# EAGLE board eTapper1main33 (EAGLE 8.3.2)
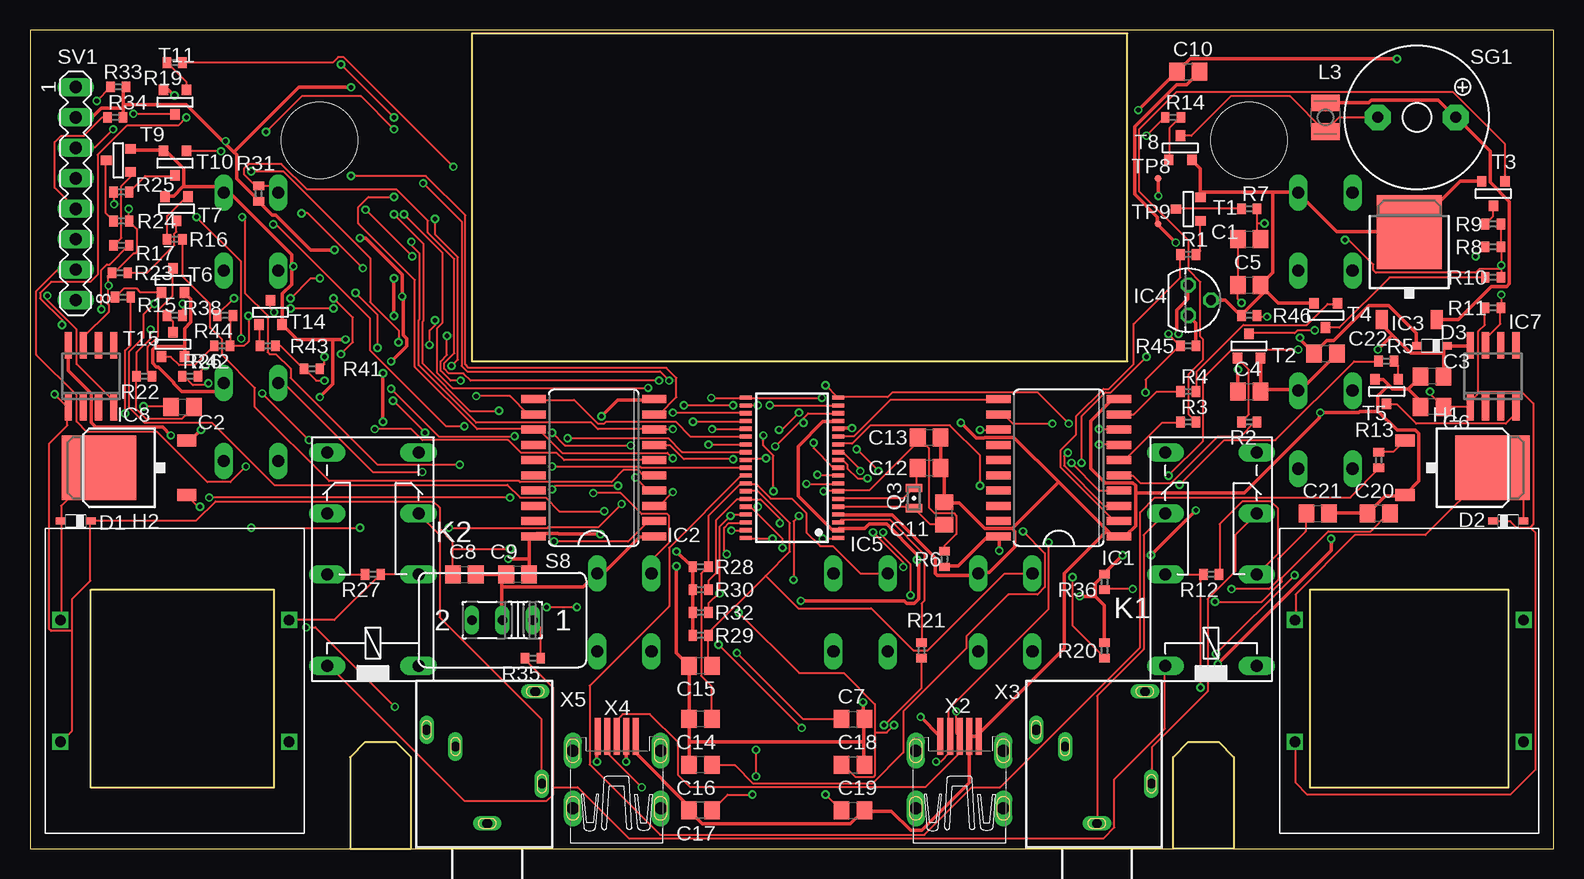
[diagram p0: board, top side]
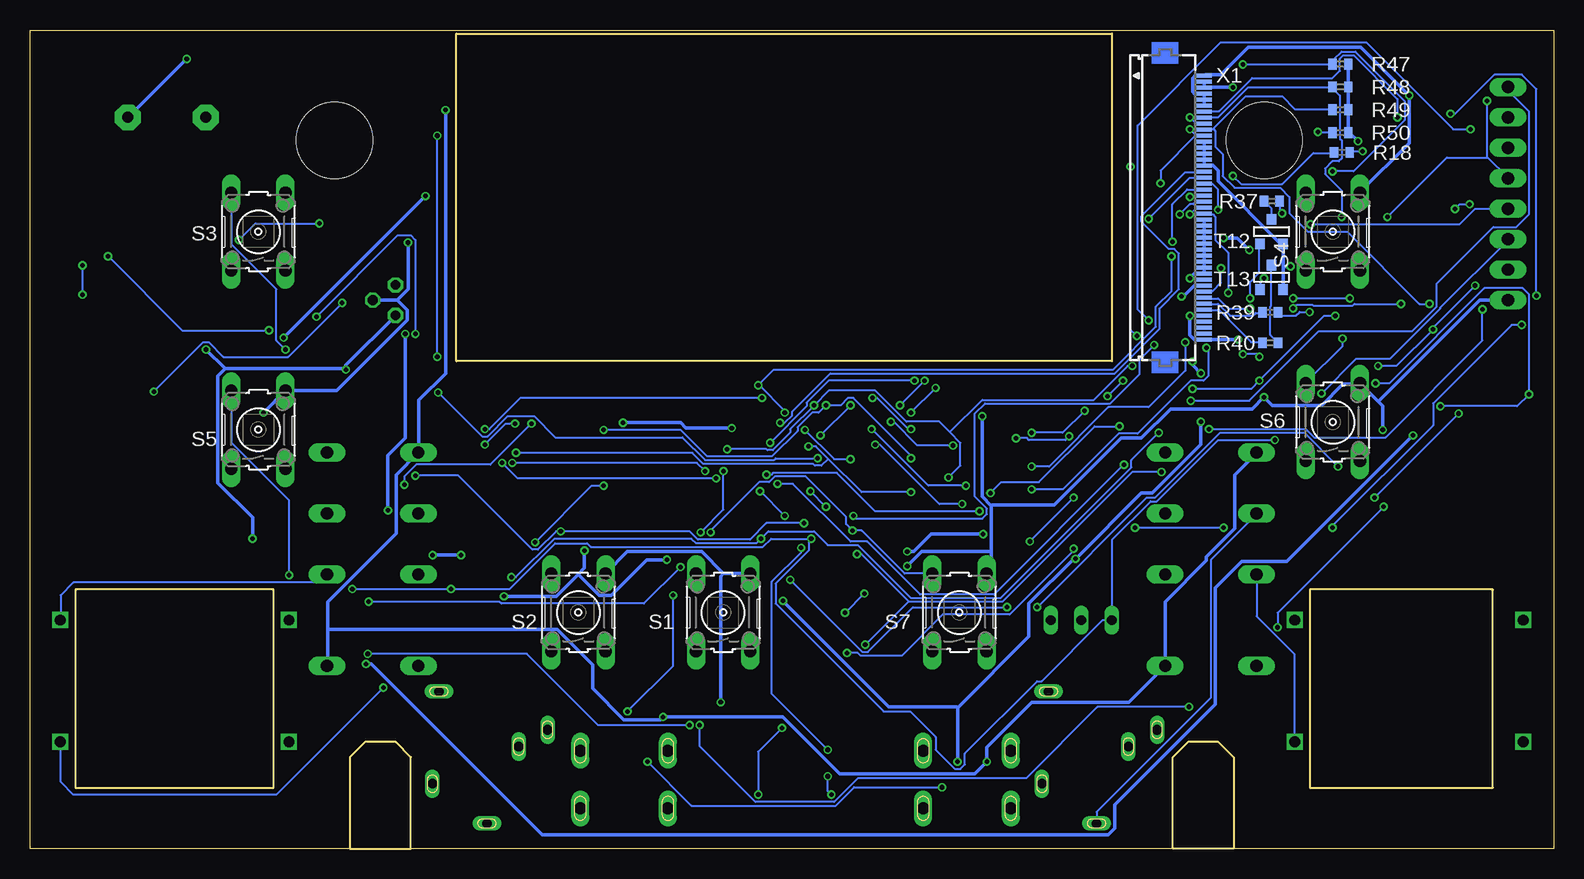
[diagram p1: board, bottom side, seen from below]

Size 126.98 x 68.25 mm. Coordinates in mm from the lower left corner, seen from the top.
Outline: 26.67,0 0,0 0,68.25 126.98,68.25 126.98,0 100.33,0
Outline: 31.75,0 95.25,0
Outline: 26.67,0 26.67,7.62 27.94,8.89 30.48,8.89 31.75,7.62 31.75,0
Outline: 26.67,0 31.75,0
Outline: 95.25,0 95.25,7.62 96.52,8.89 99.06,8.89 100.33,7.62 100.33,0
Outline: 100.33,0 95.25,0
Outline: 106.68,21.59 123.19,21.59 123.19,5.08 106.68,5.08 106.68,21.59
Outline: 5.08,21.59 20.32,21.59 20.32,5.08 5.08,5.08 5.08,21.59
Outline: 36.83,67.94 36.83,40.64 91.44,40.64 91.44,67.94 36.83,67.94
Copper layers (1*16): Top 0.035mm / dielectric 1.5mm / Bottom 0.035mm
Design rules "default *": minimum track width 6mil, minimum drill 15mil, track to track 6mil, track to pad 6mil, pad to pad 6mil, via to via 6mil, smd to smd 6mil, copper to edge 15mil, drill to drill 6mil, minimum pad ring 6mil, minimum via ring 6mil, stop-mask expansion 4mil, vias tented up to drill 0mil, thermal gap 10mil
Net classes: 1 GND: width 0.305 mm, clearance 0.152 mm; 2 BAT+: width 0.305 mm, clearance 0.152 mm; 3 +9V: width 0.305 mm, clearance 0.152 mm; 4 +3V: width 0.305 mm, clearance 0.152 mm; 5 VCC: width 0.305 mm, clearance 0.152 mm
Holes 6.35 mm at 24.13,59.05 101.6,59.05

## Footprints (pad centres in the part's own frame; a part is rotated, then mirrored left to right if it is on the bottom)
C0805 = smd 1.3 x 1.5: 1 -0.95,0; 2 0.95,0
SOD323_ST = smd 0.8 x 0.6: A 1.25,0; C -1.25,0
XFMR = drill 0.889 square: P$1 -10.16,5.08; P$2 -10.16,-5.08; P$3 8.89,5.08; P$4 8.89,-5.08
D-PAK_TO252AA = smd 1 x 1.6: 1 -2.28,-4.8; 3 2.28,-4.8 | smd 5.4 x 6.2: 4 0,2.5
SO20W = smd 0.66 x 2.032: 1 -5.715,-5.029; 2 -4.445,-5.029; 3 -3.175,-5.029; 4 -1.905,-5.029; 5 -0.635,-5.029; 6 0.635,-5.029; 7 1.905,-5.029; 8 3.175,-5.029; 9 4.445,-5.029; 10 5.715,-5.029; 11 5.715,5.029; 12 4.445,5.029; 13 3.175,5.029; 14 1.905,5.029; 15 0.635,5.029; 16 -0.635,5.029; 17 -1.905,5.029; 18 -3.175,5.029; 19 -4.445,5.029; 20 -5.715,5.029
TO252 = smd 1 x 1.6: 1 -2.28,-4.8; 3 2.28,-4.8 | smd 5.4 x 6.2: 2 0,2.5
TO92 = drill 0.813 pad 1.27 octagon: 1 -1.27,0; 2 0,1.905; 3 1.27,0
TSSOP38_R-PDSO-G38-DA = smd 0.35 x 1: 1 -5.85,-3.85; 2 -5.2,-3.85; 3 -4.55,-3.85; 4 -3.9,-3.85; 5 -3.25,-3.85; 6 -2.6,-3.85; 7 -1.95,-3.85; 8 -1.3,-3.85; 9 -0.65,-3.85; 10 0,-3.85; 11 0.65,-3.85; 12 1.3,-3.85; 13 1.95,-3.85; 14 2.6,-3.85; 15 3.25,-3.85; 16 3.9,-3.85; 17 4.55,-3.85; 18 5.2,-3.85; 19 5.85,-3.85; 20 5.85,3.85; 21 5.2,3.85; 22 4.55,3.85; 23 3.9,3.85; 24 3.25,3.85; 25 2.6,3.85; 26 1.95,3.85; 27 1.3,3.85; 28 0.65,3.85; 29 0,3.85; 30 -0.65,3.85; 31 -1.3,3.85; 32 -1.95,3.85; 33 -2.6,3.85; 34 -3.25,3.85; 35 -3.9,3.85; 36 -4.55,3.85; 37 -5.2,3.85; 38 -5.85,3.85
SO08 = smd 0.6 x 2.2: 1 -1.905,-2.6; 2 -0.635,-2.6; 3 0.635,-2.6; 4 1.905,-2.6; 5 1.905,2.6; 6 0.635,2.6; 7 -0.635,2.6; 8 -1.905,2.6
351 = drill 1.016 long: 1 -3.81,-3.81; 16 -3.81,3.81; O1 8.89,-3.81; O2 8.89,3.81; P1 3.81,-3.81; P2 3.81,3.81; S1 13.97,-3.81; S2 13.97,3.81
L2825P = smd 1.4 x 2.4: 1 -1.2,0; 2 1.2,0
FC-12M = smd 0.7 x 1.4: 1 -0.85,0; 2 0.85,0
R0402 = smd 0.7 x 0.9: 1 -0.65,0; 2 0.65,0
B3F-10XX = drill 1.016 long: 1 -3.251,2.261; 2 3.251,2.261; 3 -3.251,-2.261; 4 3.251,-2.261
M251 = drill 0.813 long: 1 -2.54,0; 2 0,0; 3 2.54,0
F/QMBIII = drill 0.914 pad 2.159 octagon: + 3.251,0; - -3.251,0
MA08-1 = drill 1.016 long: 1 -8.89,0; 2 -6.35,0; 3 -3.81,0; 4 -1.27,0; 5 1.27,0; 6 3.81,0; 7 6.35,0; 8 8.89,0
SOT-23 = smd 0.787 x 0.889: 1 0.025,-1.016; 2 -0.94,1.016; 3 0.991,1.016
TP06R = smd 0.6 x 0.6: TP 0,0
FH12-45S-0.5SH = smd 0.3 x 1.3: 1 -13,3.25; 2 -12.5,3.25; 3 -12,3.25; 4 -11.5,3.25; 5 -11,3.25; 6 -10.5,3.25; 7 -10,3.25; 8 -9.5,3.25; 9 -9,3.25; 10 -8.5,3.25; 11 -8,3.25; 12 -7.5,3.25; 13 -7,3.25; 14 -6.5,3.25; 15 -6,3.25; 16 -5.5,3.25; 17 -5,3.25; 18 -4.5,3.25; 19 -4,3.25; 20 -3.5,3.25; 21 -3,3.25; 22 -2.5,3.25; 23 -2,3.25; 24 -1.5,3.25; 25 -1,3.25; 26 -0.5,3.25; 27 0,3.25; 28 0.5,3.25; 29 1,3.25; 30 1.5,3.25; 31 2,3.25; 32 2.5,3.25; 33 3,3.25; 34 3.5,3.25; 35 4,3.25; 36 4.5,3.25; 37 5,3.25; 38 5.5,3.25; 39 6,3.25; 40 6.5,3.25; 41 7,3.25; 42 7.5,3.25; 43 8,3.25; 44 8.5,3.25; 45 9,3.25
32005-501 = smd 3.1 x 0.5: 1 3,1.6; 2 3,0.8; 3 3,0; 4 3,-0.8; 5 3,-1.6 | drill 1 pad 1.422 long: M1 -3,3.65; M2 -3,-3.65; M3 1.8,3.65; M4 1.8,-3.65
1503_09 = drill 0.8 pad 1.2 long: 1 0,-2.1; 2 -4.55,-5.4; 3 5.05,-9.9; 4 -4,-13.1; 5 2.65,-8.5

## Placement (x,y rotation side)
C1  .01uF  [C0805]  101.6,50.8 0 top
C2  .01uF  [C0805]  12.7,36.83 0 top
C3  [C0805]  116.84,39.37 180 top
C4  [C0805]  101.6,38.1 0 top
C5  3.3uF  [C0805]  101.6,46.99 0 top
C6  220uF  [C0805]  116.84,36.83 180 top
C7  220uF  [C0805]  68.58,10.79 0 top
C8  3.3uF  [C0805]  36.2,22.86 0 top
C9  47uF  [C0805]  40.64,22.86 180 top
C10  47uF  [C0805]  96.52,64.77 0 top
C11  12pF  [C0805]  76.2,27.94 90 top
C12  12pF  [C0805]  74.93,31.75 0 top
C13  1 uF  [C0805]  74.93,34.29 0 top
C14  .1uF  [C0805]  55.88,10.79 180 top
C15  .1uF  [C0805]  55.88,15.24 180 top
C16  .1uF  [C0805]  55.88,6.99 180 top
C17  .1uF  [C0805]  55.88,3.17 180 top
C18  .1uF  [C0805]  68.58,6.99 0 top
C19  .1uF  [C0805]  68.58,3.17 0 top
C20  .1uF  [C0805]  112.39,27.94 180 top
C21  .1uF  [C0805]  107.31,27.94 0 top
C22  220uF  [C0805]  107.95,41.27 0 top
D1  BAT60J  [SOD323_ST]  3.81,27.3 180 top
D2  BAT60J  [SOD323_ST]  123.19,27.3 0 top
D3  BAT60J  [SOD323_ST]  116.84,41.91 180 top
F1  XFMR  [XFMR]  115.57,13.97 0 top
F2  XFMR  [XFMR]  12.7,13.97 0 top
H1  IRLR024N  [D-PAK_TO252AA]  119.38,31.75 270 top
H2  IRLR024N  [D-PAK_TO252AA]  8.26,31.75 90 top
IC1  74AC373DW  [SO20W]  85.72,31.75 90 top
IC2  74AC373DW  [SO20W]  46.99,31.75 90 top
IC3  LM2936DT-5.0  [TO252]  114.94,48.9 0 top
IC4  LM2936Z-3.0  [TO92]  96.52,45.72 270 top
IC5  MSP430F2232IDA  [TSSOP38_R-PDSO-G38-DA]  63.5,31.75 90 top
IC7  LP2951M  [SO08]  121.92,39.37 0 top
IC8  LP2951M  [SO08]  5.08,39.37 0 top
K1  351  [351]  98.42,19.05 90 top
K2  351  [351]  28.57,19.05 90 top
L3  470uH  [L2825P]  107.95,60.96 270 top
Q3  FC-12M  [FC-12M]  73.66,29.21 90 top
R1  47K  [R0402]  96.52,49.53 0 top
R2  47K  [R0402]  101.6,35.56 180 top
R3  47K  [R0402]  96.52,35.56 0 top
R4  47K  [R0402]  96.52,38.1 0 top
R5  47K  [R0402]  113.03,40.64 0 top
R6  47K  [R0402]  76.2,24.13 270 top
R7  1K  [R0402]  101.6,53.34 0 top
R8  3K  [R0402]  121.92,50.16 0 top
R9  6K  [R0402]  121.92,52.07 0 top
R10  12K  [R0402]  121.92,47.62 0 top
R11  3K  [R0402]  121.92,45.09 0 top
R12  51K  [R0402]  98.42,22.86 180 top
R13  1K  [R0402]  112.39,32.38 90 top
R14  1K  [R0402]  95.25,60.96 0 top
R15  47K  [R0402]  7.75,45.97 180 top
R16  47K  [R0402]  12.06,50.8 180 top
R17  47K  [R0402]  7.62,50.29 180 top
R18  47K  [R0402]  17.65,58.04 0 bottom
R19  47K  [R0402]  12.06,65.53 180 top
R20  47K  [R0402]  89.53,16.51 90 top
R21  1K  [R0402]  74.3,16.51 270 top
R22  1K  [R0402]  9.53,39.37 180 top
R23  3K  [R0402]  7.49,48.01 180 top
R24  6K  [R0402]  7.62,52.32 0 top
R25  12K  [R0402]  7.62,54.74 180 top
R26  3K  [R0402]  13.34,39.37 0 top
R27  51K  [R0402]  28.57,22.86 180 top
R28  47K  [R0402]  55.88,23.5 180 top
R29  47K  [R0402]  55.88,17.78 180 top
R30  47K  [R0402]  55.88,21.59 180 top
R31  47K  [R0402]  19.05,54.61 270 top
R32  47K  [R0402]  55.88,19.68 180 top
R33  47K  [R0402]  7.37,63.5 0 top
R34  47K  [R0402]  7.11,60.96 0 top
R35  100  [R0402]  41.91,15.88 180 top
R36  47K  [R0402]  89.53,22.23 90 top
R37  100  [R0402]  23.5,53.98 0 bottom
R38  100  [R0402]  12.06,44.45 0 top
R39  100  [R0402]  23.62,44.7 180 bottom
R40  100  [R0402]  23.62,42.16 180 bottom
R41  47K  [R0402]  23.5,40.01 0 top
R42  47K  [R0402]  16,41.91 180 top
R43  47K  [R0402]  19.81,41.91 180 top
R44  47K  [R0402]  16.26,44.45 180 top
R45  47K  [R0402]  96.52,41.91 0 top
R46  10K  [R0402]  101.6,44.45 0 top
R47  47K  [R0402]  17.78,65.41 0 bottom
R48  47K  [R0402]  17.78,63.5 0 bottom
R49  47K  [R0402]  17.78,61.59 0 bottom
R50  47K  [R0402]  17.78,59.69 0 bottom
S1  [B3F-10XX]  69.22,19.68 90 bottom
S2  [B3F-10XX]  81.28,19.68 90 bottom
S3  [B3F-10XX]  107.95,51.44 90 bottom
S4  [B3F-10XX]  18.41,51.44 90 bottom
S5  [B3F-10XX]  107.95,34.92 90 bottom
S6  [B3F-10XX]  18.41,35.56 90 bottom
S7  [B3F-10XX]  49.53,19.68 90 bottom
S8  [M251]  39.37,19.05 180 top
SG1  F/QMBIII  [F/QMBIII]  115.57,60.96 0 top
SV1  100mil  [MA08-1]  3.81,54.61 270 top
T1  2N3904  [SOT-23]  96.52,53.34 270 top
T2  2N3904  [SOT-23]  101.6,41.91 180 top
T3  2N3904  [SOT-23]  121.92,54.61 0 top
T4  2N3904  [SOT-23]  107.95,44.45 0 top
T5  2N3904  [SOT-23]  113.03,38.1 0 top
T6  2N3904  [SOT-23]  11.94,47.37 180 top
T7  2N3904  [SOT-23]  12.19,53.34 0 top
T8  2N3904  [SOT-23]  95.89,58.42 180 top
T9  2N3904  [SOT-23]  7.37,57.4 270 top
T10  2N3904  [SOT-23]  12.06,57.15 0 top
T11  2N3904  [SOT-23]  12.06,62.23 0 top
T12  2N3904  [SOT-23]  23.5,51.44 180 bottom
T13  2N3904  [SOT-23]  23.5,47.62 180 bottom
T14  2N3904  [SOT-23]  20.07,44.7 180 top
T15  2N3904  [SOT-23]  11.94,42.04 180 top
TP8  TPSTP06R  [TP06R]  93.98,55.88 0 top
TP9  TPSTP06R  [TP06R]  93.98,52.07 0 top
X1  FH12-45S-0.5SH  [FH12-45S-0.5SH]  32.38,51.44 270 bottom
X2  MINI-USB_SHIELD5P4-32005-501  [32005-501]  77.47,6.35 90 top
X3  1503_09  [1503_09]  88.9,0 180 top
X4  MINI-USB_SHIELD5P4-32005-501  [32005-501]  48.9,6.35 90 top
X5  1503_09  [1503_09]  38.1,0 180 top

## Library data of the parts
C1-C22 L3 = rcl
D1-D3 = diode
F1 F2 = XFMR1
H1 H2 = IRLR024N
IC1 IC2 = 74xx-eu
IC3 = national-semiconductor; MF: NATIONAL SEMICONDUCTOR; MPN: LM2936DT-5.0/NOPB; OC_FARNELL: 1286864; OC_NEWARK: 41K4501
IC4 = national-semiconductor; MF: NATIONAL SEMICONDUCTOR; MPN: LM2936Z-3.0/NOPB; OC_FARNELL: 1312709; OC_NEWARK: 41K4531
IC5 = texas; MPN: MSP430F2232IDA; OC_FARNELL: 1610178; OC_NEWARK: 28M6312
IC7 IC8 = national-semiconductor; MF: FAIRCHILD SEMICONDUCTOR; MPN: LP2951CM; OC_FARNELL: 9488561; OC_NEWARK: 78K6014
K1 K2 = relay; OC_FARNELL: unknown; OC_NEWARK: unknown
Q3 = crystal
R1-R50 = resistor
S1-S7 = switch-omron; MPN: B3F-1000; OC_FARNELL: 176432; OC_NEWARK: 36M3542
S8 = switch
SG1 = buzzer; OC_FARNELL: unknown; OC_NEWARK: unknown
SV1 = con-lstb; OC_FARNELL: unknown; OC_NEWARK: unknown
T1-T15 = zetex; MPN: DSS20201L-7; OC_FARNELL: 1710688; OC_NEWARK: 25R4555
TP8 TP9 = testpad
X1 = con-hirose; OC_FARNELL: unknown; OC_NEWARK: unknown
X2 X4 = con-cypressindustries; OC_FARNELL: unknown; OC_NEWARK: unknown
X3 X5 = con-lumberg; OC_FARNELL: 1243244; OC_NEWARK: unknown

## Nets
+3V [+3V]: C9.1 IC1.20 IC2.20 IC4.1 IC5.2 IC5.16 R6.2 R20.2 R28.2 R29.2 R30.2 R31.2 R32.2 R33.2 R34.2 R36.2 R47.2 R48.2 R49.2 R50.2 SV1.2 X1.2 X1.3 X1.36 X4.4
+9V [+9V]: C3.1 C4.1 D3.C IC3.1 IC4.3 IC7.8 IC8.8 R45.2
/LCS: IC5.8 R48.1 X1.8
/RST: C13.1 IC5.7 R6.1 SV1.7
BAT+ [BAT+]: C22.1 D3.A TP8.TP
GND [GND]: C3.2 C4.2 C5.2 C6.2 C7.2 C8.2 C9.2 C10.2 C11.2 C12.2 C13.2 C14.2 C15.2 C16.2 C17.2 C18.2 C19.2 C20.2 C21.2 C22.2 H1.3 H2.3 IC1.1 IC1.10 IC2.1 IC2.10 IC3.2 IC4.2 IC5.4 IC5.15 R46.1 S1.4 S2.4 S3.4 S4.4 S5.4 S6.4 S7.4 S8.2 SV1.8 T1.2 T2.2 T3.2 T4.2 T5.2 T6.2 T7.2 T8.2 T9.2 T10.2 T11.2 T12.2 T13.2 T14.2 T15.2 TP9.TP X1.1 X1.4 X1.5 X1.6 X1.12 X1.13 X1.14 X1.15 X1.16 X1.25 X1.26 X1.27 X1.28 X1.29 X1.30 X1.31 X1.32 X1.33 X1.34 X1.45 X2.4 X2.5 X4.5
IO1_0: C14.1 IC5.31 R28.1 S1.2
IO1_1: C15.1 IC5.32 R29.1 S2.2
IO1_2: C16.1 IC5.33 R30.1 S3.2
IO1_3: C17.1 IC5.34 R31.1 S4.2
IO4_0: IC1.3 IC2.3 IC5.17 X1.17
IO4_1: IC1.4 IC2.4 IC5.18 X1.18
IO4_2: IC1.7 IC2.7 IC5.19 X1.19
IO4_3: IC1.8 IC2.8 IC5.20 X1.20
IO4_4: IC1.13 IC2.13 IC5.21 X1.21
IO4_5: IC5.22 X1.22
IO4_6: IC5.23 X1.23
IO4_7: IC5.24 X1.24
J2_1: F1.P$3 K1.P1 R12.1
J2_3: F1.P$4 K1.P2 R12.2
J3_1: F2.P$3 K2.P1 R27.1
J3_3: F2.P$4 K2.P2 R27.2
LD_/C: IC5.29 R47.1 X1.9
LEDK1: R37.2 X1.37
LEDK2: R38.2 X1.38
LEDK3: R39.2 X1.39
LEDK4: R40.2 X1.40
LHVTRIG: IC5.30 R13.1
LLED: IC5.27 R41.1 R42.1 R43.1 R44.1
LNC1: X1.41
LNC2: X1.42
LNC3: X1.43
LNC4: X1.44
LRD: IC5.10 R50.1 X1.11
LRESET: IC5.26 X1.7
LSDO: X1.35
LTS+: K1.O2 X3.1
LTS-: K1.O1 X3.2
LVSEL: IC1.11 IC5.14
LWR: IC5.9 R49.1 X1.10
N$1: IC1.2 R1.1
N$2: IC1.5 R2.1
N$3: IC1.6 R3.1
N$4: IC1.9 R4.1
N$5: IC1.12 R5.1
N$6: L3.2 SG1.- T8.1
N$7: R4.2 T4.3
N$8: R5.2 T5.3
N$9: D2.A F1.P$1 H1.4
N$10: R7.1 T1.1
N$11: R8.1 T2.1
N$12: R9.1 T3.1
N$13: R1.2 T1.3
N$14: R2.2 T2.3
N$15: R3.2 T3.3
N$16: R10.1 T4.1
N$17: C1.2 IC7.7 R7.2 R8.2 R9.2 R10.2 R11.2
N$18: C1.1 C5.1 C6.1 D2.C F1.P$2 IC7.1 R11.1
N$19: D1.A F2.P$1 H2.4
N$20: IC2.2 R15.1
N$21: H1.1 R13.2
N$22: R14.2 T8.3
N$23: R35.1 S8.1
N$24: IC2.5 R16.1
N$25: IC2.6 R17.1
N$26: IC2.9 R18.1
N$27: IC2.12 R19.1
N$28: R44.2 T13.3
N$29: R15.2 T6.3
N$30: R16.2 T7.3
N$31: R17.2 T9.3
N$32: R18.2 T10.3
N$33: R19.2 T11.3
N$34: K1.16 K2.16 R35.2
N$35: R22.1 T6.1
N$36: R23.1 T7.1
N$37: R24.1 T9.1
N$38: R25.1 T10.1
N$39: C2.2 IC8.7 R22.2 R23.2 R24.2 R25.2 R26.2
N$40: C2.1 C7.1 C8.1 D1.C F2.P$2 IC8.1 R26.1
N$41: R37.1 T12.1
N$42: H2.1 R21.2
N$43: R38.1 T15.1
N$44: R39.1 T14.1
N$45: IC7.4 T5.1
N$46: R40.1 T13.1
N$47: IC8.4 T11.1
N$48: R43.2 T14.3
N$49: R41.2 T12.3
N$50: R42.2 T15.3
RHVTRIG: IC5.3 R21.1
RTS+: K2.O2 X5.1
RTS-: K2.O1 X5.2
RVSEL: IC2.11 IC5.25
SCL: IC5.13 X2.2 X4.2
SDA: IC5.12 X2.3 X4.3
SPKR: IC5.11 R14.1
TCK: C18.1 IC5.35 R32.1 S5.2 SV1.3
TDI: C20.1 IC5.37 R34.1 S7.2 SV1.5
TDO: C21.1 IC5.38 R36.1 S8.3 SV1.6
TEST: IC5.1 R20.1 SV1.1
TMS: C19.1 IC5.36 R33.1 S6.2 SV1.4
VBAT: IC5.28 R45.1 R46.2
VCC [VCC]: C10.1 IC3.3 K1.1 K1.S2 K2.1 K2.S2 L3.1 SG1.+ X2.1 X4.1
XIN: C12.1 IC5.6 Q3.2
XOUT: C11.1 IC5.5 Q3.1

## Tracks (layer width: path | path; a pad name or v marks a point on that pad's centre or on a via)
+3V  (via drill 0.38)
  Top 0.305: 7.77,62.03 7.77,63.25 8,63.48 R33.2 | 7.77,62.03 7.77,61.72 | 7.77,61.72 7.77,60.96 R34.2 | 16.15,58.9 13.03,62.03 7.77,62.03 | 16.15,58.9 16.99,58.06 | 16.99,58.06 17.22,57.84 17.22,55.85 19.05,54.03 R31.2 19.13,53.87 20.19,52.81 20.5,52.81 23.39,49.91 v25.38,49.91 | v27.51,50.9 27.96,50.9 31.01,47.85 v31.01,46.02 31.09,45.95 31.09,42.82 31.39,42.52 31.39,41.91 v30.1,40.62 | v26.75,63.48 22.4,63.48 16.99,58.06 | v16.31,58.98 16.23,58.98 16.15,58.9 | SV1.2 5.18,60.96 5.94,61.72 7.77,61.72 | R29.2 55.24,17.83 55.24,19.66 R32.2 55.24,19.81 55.24,21.57 R30.2 55.24,21.72 55.24,23.47 R28.2 55.09,23.55 v53.87,24.77 | 41.6,24.16 41.6,25.68 IC2.20 42.22,26.29 43.97,26.29 44.04,26.21 v47.55,26.21 | 41.6,24.16 41.6,22.86 C9.1 | v49.68,7.24 49.68,9.3 X4.4 | 41.6,24.16 v39.85,24.16 | IC5.16 67.28,35.59 66.06,35.59 64.01,33.53 64.01,29.41 66.83,26.59 67.28,26.59 IC5.2 67.44,26.67 69.57,26.67 69.95,27.05 71.4,27.05 73.91,24.54 v73.91,24.08 74.07,23.93 74.07,20.8 73.69,20.42 73.08,20.42 72.85,20.65 v64.24,20.65 | R6.2 76.2,23.55 77.34,23.55 79.78,25.98 80.7,25.98 IC1.20 80.77,25.91 v80.77,24.84 | R20.2 89.53,20.27 88.77,21.03 | 88.77,21.03 88.77,22.1 89.53,22.86 R36.2 89.61,23.01 v91.06,24.46 | v95.71,42.9 95.56,43.05 95.56,44.88 96.47,45.8 96.47,46.94 IC4.1 | v93.42,24.46 v97.16,28.19 | 88.77,21.03 v87.48,21.03 | v29.41,35.59 v29.41,39.62
  Bottom 0.305: R47.2 17.14,65.38 17.14,63.63 R48.2 17.14,63.48 17.14,61.72 R49.2 17.14,61.57 17.14,59.74 R50.2 16.99,59.66 v16.31,58.98 | X1.2 29.11,63.93 29.11,63.48 X1.3 28.96,63.48 v26.75,63.48 | v31.01,46.02 30.86,46.02 29.95,46.94 29.18,46.94 X1.36 | v27.51,50.9 26.36,50.9 v25.38,49.91 | v53.87,24.77 53.34,24.77 51.89,26.21 v47.55,26.21 | 49.68,11.73 v49.68,7.24 | 49.68,11.73 43.74,17.68 43.74,20.42 40.01,24.16 v39.85,24.16 34.37,29.64 33.45,29.64 29.41,33.68 v29.41,35.59 | v95.71,42.9 95.71,34.21 97.16,32.77 v97.16,28.19 | v91.06,24.46 v93.42,24.46 | v80.77,24.84 80.77,23.39 81.31,22.86 | 81.31,22.86 83.13,21.03 v87.48,21.03 | v73.91,24.08 75.59,24.08 78.56,21.11 79.55,21.11 81.31,22.86 | v64.24,20.65 55.4,11.81 49.76,11.81 49.68,11.73 | v30.1,40.62 30.1,40.31 v29.41,39.62
+9V  (via drill 0.38)
  Top 0.305: IC7.8 120.02,41.91 D3.C 117.96,41.83 117.81,41.68 117.81,41.3 | 117.81,41.3 117.81,39.4 C3.1 | 113.54,42.82 115.06,41.3 117.81,41.3 | 113.54,42.82 112.7,43.66 112.7,44.04 IC3.1 | IC4.3 97.16,43.81 97.16,41.91 R45.2 | v100.66,39.93 C4.1 | v11.73,34.44 11.05,35.13 5.49,35.13 5.11,35.51 5.11,37.95 3.2,39.85 3.2,41.91 IC8.8 | v98.98,15.39 108.43,24.84 v108.43,25.83 | v112.32,41.6 113.54,42.82
  Bottom 0.305: IC4.3 100.66,40.31 v100.66,39.93 100.74,40.01 110.72,40.01 | v11.73,34.44 22.25,23.93 25.98,23.93 28.19,21.72 28.19,12.04 36.58,3.66 36.58,1.68 37.11,1.14 84.28,1.14 98.53,15.39 v98.98,15.39 | v108.43,25.83 108.43,27.58 111.33,30.48 111.33,39.4 110.72,40.01 | 110.72,40.01 v112.32,41.6
/LCS  (via drill 0.38)
  Top 0.152: v64.69,30.4 67.28,30.4 IC5.8 | v35.81,32 28.96,32 21.72,39.24 21.72,40.01 20.5,41.22 19.96,41.22 19.81,41.38 19.81,44.42 17.91,46.33 17.91,52.43 v17.68,52.65
  Bottom 0.152: X1.8 29.11,60.96 27.96,60.96 25.45,63.48 18.44,63.48 R48.1 18.44,63.4 17.83,62.79 17.83,59.21 17.68,59.05 17.68,57.53 17.91,57.3 18.44,57.3 19.05,56.69 19.05,56.24 17.68,54.86 v17.68,52.65 | v64.69,30.4 63.4,30.4 58.6,25.6 57.23,25.6 52.81,21.18 46.63,21.18 v35.81,32
/RST  (via drill 0.38)
  Top 0.152: R6.1 76.2,25.22 77.19,26.21 77.19,27.74 76.96,27.96 75.36,27.96 74.91,28.42 74.91,33.38 C13.1 74.14,34.06 69.95,29.87 67.36,29.87 IC5.7 67.28,29.79 v66.14,29.79 | v17.98,31.85 16.69,30.56 14.78,30.56 10.59,34.75 4.72,34.75 3.89,35.59 3.89,37.8 0.53,41.15 0.53,46.48 2.29,48.23 3.81,48.23 SV1.7 | v45.57,20.12 v43.05,20.12 | v63.63,22.4 63.63,27.28 v64.08,27.74
  Bottom 0.152: v17.98,31.85 20.8,34.67 27.81,34.67 33.22,29.26 33.91,29.26 v43.05,20.12 | v45.57,20.12 53.42,20.12 57.15,16.38 57.61,16.38 v63.63,22.4 | v66.14,29.79 v64.08,27.74
BAT+  (via drill 0.38)
  Top 0.305: v94.03,54.41 94.03,55.85 TP8.TP | v105.84,42.6 105.84,42.44 106.98,41.3 C22.1 107.06,41.38 108.05,42.37 108.66,42.37 111.56,45.26 113.23,45.26 115.52,42.98 115.52,41.91 D3.A
  Bottom 0.305: v105.84,42.6 v94.03,54.41
GND  (via drill 0.38)
  Top 0.305: C8.2 C9.2 39.32,22.78 39.32,21.79 | 39.32,21.79 39.32,19.05 S8.2 | IC2.1 51.97,25.98 50.83,25.98 47.78,22.94 S7.4 47.17,22.86 46.1,21.79 39.32,21.79 | v47.62,36.04 49,37.41 51.97,37.41 IC2.10 | 12.88,41.83 12.88,43.36 13.41,43.89 13.41,45.8 12.88,46.33 T6.2 | 12.88,41.83 T15.2 | v14.25,34.9 13.41,34.06 13.11,34.06 H2.3 | 12.88,41.83 10.44,41.83 10.21,41.6 10.21,40.46 10.52,40.16 10.67,40.16 11.96,38.86 11.96,38.79 12.65,38.1 15.47,38.1 16.15,38.79 S6.4 | T9.2 8.38,58.29 8.46,58.22 11.12,58.22 T10.2 11.2,58.06 11.43,58.06 12.8,56.69 12.8,55.24 12.72,55.17 | 21.79,48.54 21.79,49.53 16.69,54.63 16.15,54.63 S4.4 16.08,54.79 15.7,55.17 12.72,55.17 | 21.79,48.54 21.79,47.02 21.03,46.25 21.03,43.74 T14.2 22.25,42.44 25.22,42.44 | 12.72,55.17 11.96,54.41 11.28,54.41 T7.2 | T11.2 11.58,63.25 v12.04,62.79 | 25.22,42.44 v26.29,42.44 | v30.33,44.42 v30.33,47.55 | v21.95,48.54 21.79,48.54 | v24.16,37.64 25.22,38.71 25.22,42.44 | 113.23,38.63 113.54,38.33 114.83,38.33 | 113.23,38.63 112.78,39.09 112.09,39.09 T5.2 | 114.83,38.33 115.82,39.32 C3.2 | 114.83,38.33 115.82,37.34 115.82,36.88 C6.2 | C21.2 108.28,27.96 111.4,27.96 C20.2 111.56,28.04 112.93,29.41 114.53,29.41 H1.3 114.68,29.57 115.75,30.63 115.75,34.59 115.44,34.9 113.92,34.9 112.32,36.5 | 113.23,38.63 112.32,37.72 112.32,36.5 | C10.2 96.39,63.7 95.56,63.7 92.05,60.2 92.05,54.56 93.95,52.65 93.95,52.12 TP9.TP 94.03,51.97 v95.48,50.52 | T3.2 119.18,55.63 114.99,51.44 IC3.2 114.83,51.44 108.89,51.44 105.77,54.56 S3.4 105.69,54.71 103.56,54.71 | 97.54,54.71 97.54,56.69 T8.2 | 97.54,54.71 T1.2 | 103.56,54.71 97.54,54.71
  Top 0.305: T2.2 102.56,40.84 102.56,38.1 C4.2 102.64,38.25 105.61,38.25 S5.4 105.84,38.18 108.89,41.22 C22.2 | T4.2 106.98,45.49 104.01,45.49 102.56,46.94 C5.2 | C5.2 102.95,46.48 100.97,44.5 R46.1 100.81,44.5 99.59,45.72 IC4.2 | 103.56,54.71 103.56,48.01 102.64,47.09 C5.2 | 112.32,36.5 112.24,36.42 110.8,36.42 110.72,36.35 v107.52,36.35 107.44,36.27 107.44,35.89 101.19,29.64 92.13,29.64 | X4.5 50.52,9.3 50.52,7.92 54.86,3.58 54.86,3.2 C17.2 55.02,3.05 56.01,2.06 68.35,2.06 69.42,3.12 C19.2 69.57,3.12 71.78,3.12 73.38,1.52 74.3,1.52 78.26,5.49 78.26,9.3 X2.4 78.41,9.37 79.02,9.37 X2.5 79.02,9.53 86.18,16.69 86.18,22.94 89.76,26.52 | 69.49,8.91 69.49,10.74 C7.2 69.42,10.9 v69.42,12.19 | 69.49,8.91 69.49,7.01 C18.2 | 54.94,8.91 54.94,10.74 C14.2 54.94,10.9 C15.2 54.86,15.32 53.87,16.31 v53.87,23.55 | 54.94,8.91 54.94,7.01 C16.2 | 54.94,8.91 69.49,8.91 | IC5.4 67.36,27.81 71.86,27.81 75.44,24.23 75.44,22.94 75.59,22.78 78.87,22.78 S2.4 79.1,23.01 79.93,23.01 82.07,25.15 82.07,26.44 81.84,26.67 | C13.2 75.89,34.29 75.89,31.77 C12.2 75.97,31.62 76.2,31.39 C11.2 76.28,28.8 77.42,28.8 79.55,26.67 81.84,26.67 | v68.5,35.05 67.36,35.05 IC5.15 | v77.57,35.51 78.87,34.21 79.48,34.21 79.55,34.29 81.99,34.29 85.72,30.56 | 89.76,26.52 90.22,26.06 90.75,26.06 IC1.1 90.83,26.14 91.36,26.14 92.13,26.9 92.13,29.64 | 89.76,26.52 85.72,30.56 | 92.13,29.64 92.13,30.25 91.9,30.48 89.61,30.48 88.39,31.7 88.39,35.66 90.14,37.41 90.75,37.41 IC1.10 | 85.72,30.56 81.84,26.67
  Bottom 0.305: v47.62,36.04 47.62,29.34 46.86,28.57 | 46.86,24.77 46.86,23.32 47.24,22.94 S7.4 | 46.86,24.77 46.86,28.57 | v14.25,34.9 14.25,36.88 14.63,37.26 | 14.63,37.26 16.15,38.79 S6.4 16.23,38.71 17.6,38.71 19.36,36.96 23.47,36.96 v24.16,37.64 25.15,36.65 31.93,36.65 34.37,34.21 36.04,34.21 41.6,28.65 46.79,28.65 46.86,28.57 | SV1.8 6.17,45.72 14.63,37.26 | X1.12 29.11,58.9 29.11,58.52 X1.13 29.11,58.37 29.11,58.06 X1.14 29.11,57.91 29.11,57.53 X1.15 29.11,57.38 29.11,57 X1.16 28.96,57 28.42,57 27.96,56.54 27.96,55.63 22.86,50.52 22.63,50.52 T12.2 22.55,48.54 | 22.55,48.54 T13.2 | X1.25 29.11,52.43 29.11,52.05 X1.26 29.11,51.89 29.11,51.51 X1.27 29.11,51.44 29.11,51.05 X1.28 29.11,50.9 29.11,50.52 X1.29 29.11,50.37 29.11,50.06 X1.30 29.11,49.91 29.11,49.53 X1.31 29.11,49.38 29.11,49.07 X1.32 29.11,48.92 29.11,48.54 X1.33 29.11,48.39 29.11,48.01 X1.34 29.26,47.93 29.95,47.93 v30.33,47.55 | X1.6 29.11,61.95 29.11,62.41 X1.5 29.11,62.56 29.11,62.87 X1.4 29.26,62.94 29.95,62.94 30.1,63.09 30.1,64.24 29.87,64.47 29.18,64.47 X1.1 29.03,64.54 27.74,64.54 25.45,66.83 16.08,66.83 v12.04,62.79 12.04,58.83 16.15,54.71 S4.4 | v26.29,42.44 29.11,42.44 X1.45 29.26,42.44 29.95,42.44 30.33,42.82 v30.33,44.42 | v21.95,48.54 22.55,48.54 | 96.39,45.72 95.56,44.88 95.56,44.04 101.42,38.18 S5.4 v107.52,36.35 | IC4.2 96.39,45.72 | v95.48,50.52 95.48,46.63 96.39,45.72 | 69.19,22.94 S1.4 | 69.19,22.94 71.02,24.77 77.19,24.77 S2.4 | v68.5,35.05 72.31,35.05 72.77,35.51 v77.57,35.51 | v69.42,12.19 69.42,22.71 69.19,22.94 | 46.86,24.77 52.65,24.77 v53.87,23.55
IO1_0
  Top 0.152: C14.1 56.77,10.82 56.77,13.56 55.93,14.4 55.93,22.94 56.46,23.47 R28.1 56.54,23.55 56.54,27.74 59.21,30.4 59.59,30.4 IC5.31 59.66,30.4 60.5,30.4 61.72,29.18 63.48,29.18 64.69,27.96 64.69,26.36 65.84,25.22 66.9,25.22 69.19,22.94 S1.2
IO1_1
  Top 0.152: C15.1 56.77,15.24 56.54,15.47 56.54,17.75 R29.1 56.54,17.83 56.54,17.98 61.3,22.75 | 61.3,22.75 63.32,24.77 63.32,27.13 60.66,29.79 59.66,29.79 IC5.32 | S2.2 81.23,22.94 74.83,16.54 73.61,16.54 70.1,20.04 64.01,20.04 61.3,22.75
IO1_2  (via drill 0.38)
  Top 0.152: R30.1 56.54,21.64 56.54,22.33 57.15,22.94 57.15,27.36 58.9,29.11 59.59,29.11 IC5.33 59.66,29.11 60.88,29.11 62.48,27.51 v62.48,27.13 | v82.75,26.44 84.58,24.61 84.58,21.79 83.97,21.18 81.53,21.18 78.03,17.68 78.03,16.69 72.77,11.43 72.77,8 70.18,5.41 60.27,5.41 58.75,6.93 56.84,6.93 C16.1 | v105.69,41.6 100.13,41.6 97.77,39.24 97.77,33.98 v94.87,31.09
  Bottom 0.152: v62.48,27.13 65.61,27.13 66.98,25.76 71.32,25.76 72.01,26.44 v82.75,26.44 83.13,26.44 84.66,24.92 85.11,24.92 91.29,31.09 v94.87,31.09 | v105.69,41.6 106.45,42.37 106.45,46.63 110.19,50.37 110.19,54.63 S3.2
IO1_3  (via drill 0.38)
  Top 0.152: S4.2 20.12,55.24 19.05,55.24 R31.1 19.05,55.32 18.75,55.32 17.83,56.24 17.83,56.69 18.21,57.07 20.95,57.07 23.09,54.94 30.56,54.94 33.15,52.35 33.15,51.36 35.36,49.15 35.36,41.3 34.52,40.46 34.52,40.01 34.9,39.62 36.12,39.62 36.73,39.01 v52.43,39.01 | 60.35,28.19 62.71,25.83 v62.71,25.07 | 60.35,28.19 60.05,28.5 59.66,28.5 IC5.34 | v60.5,6.02 v60.5,8.23 | v60.2,4.5 58.14,4.5 56.84,3.2 C17.1 | v58.6,36.96 v54.48,36.96 | v61.11,34.44 61.11,33.6 61.95,32.77 v61.95,29.79 | 60.35,28.19 v60.66,28.5
  Bottom 0.152: v62.71,25.07 62.71,24.69 65.15,22.25 65.15,12.88 v60.5,8.23 | v60.5,6.02 60.5,4.8 v60.2,4.5 | v54.48,36.96 v52.43,39.01 | v61.11,34.44 v58.6,36.96 | v60.66,28.5 v61.95,29.79
IO4_0  (via drill 0.38)
  Top 0.152: v62.1,33.53 64.28,35.7 | 64.28,35.7 64.85,36.27 67.28,36.27 IC5.17 | v53.57,29.72 52.43,28.57 IC2.3 | 64.28,35.7 v64.47,35.51 | IC1.3 89.53,28.57 86.18,31.93 86.18,32.69 v86.49,32.99
  Bottom 0.152: v62.1,33.53 61.49,33.53 60.47,32.5 | 60.47,32.5 57.68,29.72 v53.57,29.72 | v64.47,35.51 64.08,35.51 63.48,36.12 63.48,36.42 60.27,39.62 36.58,39.62 32.84,43.36 32.84,45.03 31.24,46.63 31.24,49.61 31.62,49.99 32.08,49.99 34.37,52.27 34.37,52.73 30.71,56.39 29.18,56.39 X1.17 | v86.49,32.99 71.78,32.99 70.87,32.08 61.72,32.08 61.57,31.93 61.04,31.93 60.47,32.5
IO4_1  (via drill 0.38)
  Top 0.152: v61.65,36.96 67.28,36.96 IC5.18 | v50.44,30.94 51.51,29.87 51.97,29.87 IC2.4 | v33.76,52.5 33.76,51.21 35.66,49.3 35.66,40.77 v35.13,40.23 | v86.79,32.16 89.08,29.87 90.75,29.87 IC1.4 | v68.89,33.3 v70.71,31.47
  Bottom 0.152: 50.33,34.71 49.45,33.83 49.45,31.93 v50.44,30.94 | 50.33,34.71 51.21,35.59 53.95,35.59 56.54,38.18 60.43,38.18 v61.65,36.96 63.63,34.98 63.63,34.67 65.08,33.22 65.53,33.22 65.61,33.3 v68.89,33.3 | v33.76,52.5 30.33,55.93 29.18,55.93 X1.18 | v35.13,40.23 35.51,40.23 38.33,37.41 47.62,37.41 50.33,34.71 | v86.79,32.16 71.4,32.16 v70.71,31.47
IO4_2  (via drill 0.38)
  Top 0.152: v86.56,35.43 83.97,38.02 71.86,38.02 71.48,37.64 67.36,37.64 IC5.19 67.28,37.64 v66.29,38.63 | v89.08,33.68 90.75,33.68 IC1.7 | v31.85,49.38 v27.96,53.26 | v58.6,32.46 54.48,32.46 53.34,33.6 52.05,33.6 IC2.7 | v62.41,34.9 62.64,34.9 v64.08,36.35
  Bottom 0.152: v86.56,35.43 87.33,35.43 v89.08,33.68 | v27.96,53.26 27.96,54.94 28.42,55.4 29.11,55.4 X1.19 | v31.85,49.38 31.85,46.48 33.15,45.19 33.15,43.51 36.73,39.93 65,39.93 v66.29,38.63 66.22,38.63 64.08,36.5 v64.08,36.35 | v58.6,32.46 59.97,32.46 v62.41,34.9
IO4_3  (via drill 0.38)
  Top 0.152: v56.77,37.57 59.59,37.57 IC5.20 59.66,37.57 v65.99,37.57 | v53.57,34.98 52.05,34.98 IC2.8 51.97,34.98 47.32,34.98 46.79,35.51 37.19,35.51 32.38,40.31 32.38,44.04 32.46,44.12 32.46,49.61 31.77,50.29 v31.77,50.6 | v89.08,34.98 90.75,34.98 IC1.8
  Bottom 0.152: v56.77,37.57 56.39,37.57 53.8,34.98 v53.57,34.98 | v31.77,50.6 31.77,53.72 30.56,54.94 29.18,54.94 X1.20 | v89.08,34.98 88.7,34.98 86.11,37.57 v65.99,37.57
IO4_4  (via drill 0.38)
  Top 0.152: v60.66,36.96 59.66,36.96 IC5.21 | v53.57,32.54 53.11,32.99 44.35,32.99 42.44,34.9 41.99,34.9 IC2.13 41.91,34.98 37.26,34.98 32.08,40.16 32.08,47.4 27.36,52.12 27.36,53.49 28.19,54.33 v30.33,54.33 | v79.17,34.9 80.7,34.9 IC1.13
  Bottom 0.152: v53.57,32.54 53.57,32.77 58.37,37.57 58.83,37.57 59.44,36.96 v60.66,36.96 61.27,36.35 61.8,36.35 63.02,35.13 63.02,34.82 65.15,32.69 70.56,32.69 72.77,34.9 v79.17,34.9 | v30.33,54.33 30.25,54.41 29.18,54.41 X1.21
IO4_5  (via drill 0.38)
  Top 0.152: v53.57,36.35 59.59,36.35 IC5.22 | v51.51,38.41 35.2,38.41 33.91,39.7 33.91,43.36 34.37,43.81 34.37,49.68 v31.17,52.88
  Bottom 0.152: v51.51,38.41 v53.57,36.35 | v31.17,52.88 30.33,53.72 30.02,53.72 29.87,53.87 29.18,53.87 X1.22
IO4_6  (via drill 0.38)
  Top 0.152: v55.24,35.59 59.59,35.59 IC5.23 | v50.06,33.6 44.58,33.6 v43.51,34.67 | v39.09,36.5 36.65,36.5 32.69,40.46 32.69,43.89 32.77,43.97 32.77,50.44 v30.33,52.88
  Bottom 0.152: v55.24,35.59 55.02,35.59 53.03,33.6 v50.06,33.6 | v43.51,34.67 40.92,34.67 v39.09,36.5 | v30.33,52.88 29.79,53.42 29.18,53.42 X1.23
IO4_7  (via drill 0.38)
  Top 0.152: v56.84,34.98 59.59,34.98 IC5.24 | v49,30.25 43.81,30.25 v43.51,29.95 | v28.96,41.76 28.96,44.5 v27.13,46.33
  Bottom 0.152: v56.84,34.98 52.12,30.25 v49,30.25 | v43.51,29.95 40.92,29.95 36.27,34.59 34.67,34.59 30.25,39.01 29.18,39.01 28.8,39.4 28.8,41.6 v28.96,41.76 | v27.13,46.33 27.13,49.68 28.19,50.75 28.19,52.65 28.42,52.88 29.11,52.88 X1.24
J2_1
  Top 0.152: R12.1 99.14,22.86 99.14,27.05 101.04,28.96 103.4,28.96 104.01,28.35 104.01,24.61 102.26,22.86 K1.P1
  Bottom 0.152: F1.P$3 124.44,19.05 124.44,21.11 123.37,22.17 102.95,22.17 102.26,22.86 K1.P1
J2_3  (via drill 0.38)
  Top 0.152: K1.P2 97.54,22.86 | 97.54,22.86 R12.2 | 97.54,22.86 v97.54,13.41
  Bottom 0.152: v97.54,13.41 106.45,4.5 123.37,4.5 124.44,5.56 124.44,8.84 F1.P$4
J3_1
  Top 0.152: K2.P1 R27.1 29.18,22.86 25.38,19.05 F2.P$3
J3_3
  Top 0.152: K2.P2 R27.2
  Bottom 0.152: K2.P2 24.77,19.36 21.64,16.23 21.64,8.91 F2.P$4
LD_/C  (via drill 0.38)
  Top 0.152: v30.33,60.96 v25.91,65.38 | v43.51,31.85 50.83,31.85 50.9,31.77 59.59,31.77 IC5.29 | v30.71,42.22 30.71,43.2 28.35,45.57 28.35,49.23 21.11,56.46 v18.44,56.46
  Bottom 0.152: v25.91,65.38 18.44,65.38 R47.1 18.36,65.46 18.36,65.76 17.68,66.45 16.54,66.45 12.42,62.33 12.42,60.73 16.69,56.46 v18.44,56.46 | v30.33,60.96 29.87,60.5 29.18,60.5 X1.9 | v43.51,31.85 42.06,31.85 37.11,36.8 33.76,36.8 30.71,39.85 v30.71,42.22
LEDK1  (via drill 0.38)
  Top 0.152: v22.63,52.96 23.16,52.96 v27.74,48.39
  Bottom 0.152: v22.63,52.96 22.78,53.11 22.78,53.95 R37.2 | v27.74,48.39 27.74,47.17 28.42,46.48 29.11,46.48 X1.37
LEDK2  (via drill 0.38)
  Top 0.152: v12.72,45.41 12.72,44.5 R38.2 | v25.3,45.03 v21.72,45.03
  Bottom 0.152: v12.72,45.41 16.61,45.41 16.76,45.26 20.04,45.26 20.12,45.34 21.41,45.34 v21.72,45.03 | v25.3,45.03 27.13,45.03 27.96,45.87 29.11,45.87 X1.38
LEDK3
  Bottom 0.152: R39.2 24.31,44.65 24.84,44.65 25.07,44.42 26.98,44.42 27.96,45.41 29.11,45.41 X1.39
LEDK4
  Bottom 0.152: R40.2 24.31,42.22 25.22,42.22 27.89,44.88 29.11,44.88 X1.40
LHVTRIG
  Top 0.152: R13.1 112.39,31.7 111.25,30.56 111.25,30.48 110.03,29.26 93.73,29.26 92.51,28.04 92.51,16.76 80.85,5.11 78.49,5.11 74.52,1.14 52.5,1.14 46.63,7.01 46.63,13.56 53.26,20.19 53.26,25.07 59.28,31.09 59.59,31.09 IC5.30
LLED  (via drill 0.38)
  Top 0.152: 16.69,41.91 16.69,44.27 16.84,44.42 R44.1 | R43.1 20.88,41.91 22.78,40.01 R41.1 23.85,39.01 v24.54,39.01 | v44.81,34.21 53.19,34.21 54.33,33.07 59.59,33.07 IC5.27 | v40.39,34.37 34.06,34.37 v30.1,38.33 | 16.69,41.91 17.83,41.91 18.21,42.29 v18.21,44.42 | 16.69,41.91 R42.1
  Bottom 0.152: v44.81,34.21 43.89,34.21 43.74,34.06 40.69,34.06 v40.39,34.37 | v30.1,38.33 25.22,38.33 v24.54,39.01 19.13,44.42 v18.21,44.42
LRD  (via drill 0.38)
  Top 0.152: v19.66,59.74 22.63,62.71 27.58,62.71 v30.33,59.97 | v65.3,33.83 65.3,33.38 66.9,31.77 67.28,31.77 IC5.10 | v53.26,39.01 52.5,39.78 36.42,39.78 35.97,40.23 35.97,52.27 v32.77,55.47
  Bottom 0.152: v19.66,59.74 18.44,59.74 R50.1 | 29.83,59.47 29.79,59.44 29.18,59.44 X1.11 | 29.83,59.47 v30.33,59.97 | v65.3,33.83 62.26,36.88 62.26,37.19 60.43,39.01 v53.26,39.01 | v32.77,55.47 32.77,56.54 29.83,59.47
LRESET  (via drill 0.38)
  Top 0.152: v56.54,33.68 59.59,33.68 IC5.26 | v49.3,28.73 47.4,26.82 43.2,26.82 43.13,26.75 v34.9,26.75 | v18.44,26.75 v27.51,26.75 | v2.67,43.66 2.67,44.04 0.84,45.87 0.84,46.33 1.75,47.24 5.03,47.24 5.64,47.85 5.64,57.84 8.08,60.27 12.34,60.27 v13.03,60.96
  Bottom 0.152: v56.54,33.68 56.16,33.68 51.21,28.73 v49.3,28.73 | v27.51,26.75 v34.9,26.75 | v18.44,26.75 18.44,26.9 10.06,35.28 10.06,37.11 3.5,43.66 v2.67,43.66 | v13.03,60.96 13.03,62.48 16.69,66.14 17.53,66.14 17.83,65.84 17.83,64.85 18.44,64.24 25.15,64.24 27.89,61.49 29.11,61.49 X1.7
LTS+
  Top 0.152: K1.O2 92.81,26.14 92.81,16.61 88.92,12.72 88.92,2.13 X3.1
LTS-
  Top 0.152: K1.O1 100.43,26.14 100.43,23.09 98.15,20.8 98.15,13.11 93.5,8.46 93.5,5.41 X3.2
LVSEL
  Top 0.152: IC5.14 67.36,34.37 68.66,34.37 71.7,37.41 80.7,37.41 IC1.11
LWR  (via drill 0.38)
  Top 0.152: v65.61,31.17 67.28,31.17 IC5.9 | v47.85,28.12 44.12,28.12 42.98,29.26 40.84,29.26 39.78,30.33 20.34,30.33 15.16,35.51 9.53,35.51 8.23,36.8 8.23,41.38 9.45,42.6 9.45,44.5 v10.36,45.41
  Bottom 0.152: 28.38,60.01 28.42,59.97 29.11,59.97 X1.10 | 28.38,60.01 25.68,62.71 22.63,62.71 21.57,61.65 18.44,61.65 R49.1 | v65.61,31.17 65.23,31.17 65.08,31.32 59.74,31.32 56.54,28.12 v47.85,28.12 | v10.36,45.41 11.2,45.41 17.22,51.44 20.5,51.44 22.02,52.96 22.02,54.33 22.78,55.09 26.59,55.09 27.58,56.08 27.58,57.91 28.19,58.52 28.19,59.82 28.38,60.01
N$1
  Top 0.152: R1.1 95.86,47.62 91.97,43.74 91.97,40.39 89.92,38.33 89.46,38.33 87.17,36.04 87.17,34.52 85.88,33.22 85.88,31.77 90.3,27.36 90.75,27.36 IC1.2
N$2
  Top 0.152: R2.1 102.18,35.51 102.03,35.51 100.89,34.37 98.98,34.37 95.1,30.48 92.51,30.48 91.9,31.09 90.75,31.09 IC1.5
N$3
  Top 0.152: IC1.6 91.21,32.38 94.34,35.51 95.86,35.51 R3.1
N$4
  Top 0.152: R4.1 93.88,38.1 91.97,36.2 IC1.9
N$5  (via drill 0.38)
  Top 0.152: v95.78,30.33 99.52,34.06 103.78,34.06 110.34,40.62 112.32,40.62 R5.1 | v85.19,35.43 81.92,35.43 81.15,36.2 IC1.12
  Bottom 0.152: v95.78,30.33 95.78,31.01 94.79,32 88.62,32 v85.19,35.43
N$6
  Top 0.152: T8.1 96.77,59.44 100.05,62.71 105,62.71 107.9,59.82 L3.2 107.97,59.82 109.12,60.96 SG1.-
N$7
  Top 0.152: T4.3 108.89,45.41 108.13,45.41 106.38,43.66 101.12,43.66 97.23,39.78 97.23,38.1 R4.2
N$8
  Top 0.152: T5.3 114,39.17 114,40.31 113.69,40.62 R5.2
N$9
  Top 0.152: D2.A 124.44,27.36 124.44,29.18 121.92,31.7 H1.4 121.84,31.7 116.28,26.14 110.41,26.14 105.46,21.18 105.46,19.05 F1.P$1
N$10
  Top 0.152: R7.1 95.56,53.34 T1.1
N$11  (via drill 0.38)
  Top 0.152: v107.06,43.2 105.61,43.2 105.39,42.98 101.58,42.98 T2.1 | v120.47,49.38 121.23,50.14 R8.1
  Bottom 0.152: v107.06,43.2 114.3,43.2 v120.47,49.38
N$12
  Top 0.152: T3.1 121.92,53.57 121.92,52.73 121.31,52.12 R9.1
N$13
  Top 0.152: T1.3 97.54,49.84 97.23,49.53 R1.2
N$14
  Top 0.152: T2.3 101.58,39.93 101.58,36.2 100.97,35.59 R2.2
N$15
  Top 0.152: T3.3 122.91,58.75 118.57,63.09 95.56,63.09 92.43,59.97 92.43,54.79 96.55,50.67 96.55,48.23 97.54,47.24 97.54,42.67 97.77,42.44 97.77,40.77 96.55,39.55 96.55,36.2 97.16,35.59 R3.2
N$16
  Top 0.152: T4.1 109.12,43.43 113.31,47.62 R10.1
N$17  (via drill 0.38)
  Top 0.152: IC7.7 121.31,41.99 121.31,42.52 122.53,43.74 122.53,45.03 R11.2 122.61,45.11 v122.61,46.18 | 102.26,52.12 102.26,51.05 102.49,50.83 C1.2 | 102.26,52.12 R7.2 | 122.61,48.31 v122.61,48.62 122.61,50.14 R8.2 122.61,50.22 122.61,52.05 R9.2 | 122.61,48.31 122.61,47.62 R10.2 | v102.87,52.12 102.26,52.12 | v109.58,50.75 109.88,50.75 111.94,48.69 111.94,48.23 112.17,48.01 120.47,48.01 120.78,48.31 122.61,48.31
  Bottom 0.152: v102.87,52.12 108.2,52.12 v109.58,50.75 | v122.61,48.62 v122.61,46.18
N$18  (via drill 0.38)
  Top 0.152: C1.1 100.66,50.75 100.66,47.02 C5.1 100.66,46.94 100.66,45.8 v100.97,45.49 | 125.01,26.78 125.27,27.05 125.27,37.11 124.28,38.1 120.85,38.1 120.74,37.99 | 125.01,26.78 124.97,26.75 123.9,26.75 123.37,27.28 122,27.28 D2.C | 120.74,37.99 120.02,37.26 120.02,36.8 | R11.1 121.23,45.03 121.23,43.66 120.7,43.13 120.7,38.02 120.74,37.99 | 120.02,36.8 117.81,36.8 C6.1 117.73,36.88 116.66,37.95 v116.66,38.1 | 120.02,36.8 IC7.1 | 125.01,26.78 125.42,26.36 125.42,6.55 123.37,4.5 106.45,4.5 105.46,5.49 105.46,8.84 F1.P$2
  Bottom 0.152: v100.97,45.49 105.46,41 110.87,41 112.09,42.22 112.55,42.22 v116.66,38.1
N$19
  Top 0.152: H2.4 5.71,31.7 2.59,28.57 2.59,27.36 D1.A 2.59,27.28 2.59,19.05 F2.P$1
N$20  (via drill 0.38)
  Top 0.152: v7.92,36.27 7.92,41.53 8.38,41.99 8.38,45.95 R15.1 | v40.01,29.26 v14.94,29.26 | v43.66,25.6 49.84,25.6 51.51,27.28 51.97,27.28 IC2.2
  Bottom 0.152: v14.94,29.26 v7.92,36.27 | v43.66,25.6 v40.01,29.26
N$21
  Top 0.152: R13.2 112.39,33.07 113.61,33.07 114.53,33.98 H1.1
N$22
  Top 0.152: T8.3 94.94,57.45 94.94,60.05 95.86,60.96 R14.2
N$23
  Top 0.152: S8.1 42.52,18.44 42.52,15.93 R35.1
N$24
  Top 0.152: R16.1 12.72,50.75 12.72,47.7 15.01,45.41 15.01,43.43 16,42.44 16,41.15 18.75,38.41 18.75,36.8 24.92,30.63 40.77,30.63 40.84,30.56 48.46,30.56 49.45,31.55 50.67,31.55 51.05,31.17 51.97,31.17 IC2.5
N$25  (via drill 0.38)
  Top 0.152: v5.94,44.96 5.94,48.23 6.4,48.69 6.63,48.69 8.23,50.29 R17.1 | v28.73,34.98 31.77,34.98 32.69,34.06 39.85,34.06 40.92,32.99 43.89,32.99 44.5,32.38 IC2.6
  Bottom 0.152: v5.94,44.96 5.94,42.37 14.02,34.29 19.96,34.29 20.65,34.98 v28.73,34.98
N$26  (via drill 0.38)
  Top 0.152: v26.75,56.08 32.99,56.08 36.27,52.81 36.27,40.39 36.58,40.08 53.03,40.08 53.87,39.24 53.87,37.64 52.43,36.2 IC2.9
  Bottom 0.152: v26.75,56.08 26.06,55.4 22.63,55.4 20.04,57.99 18.36,57.99 R18.1
N$27  (via drill 0.38)
  Top 0.152: R19.1 25.22,65.53 25.68,65.99 26.14,65.99 v35.28,56.84 | v34.75,42.75 34.75,41.15 34.21,40.62 34.21,39.85 35.05,39.01 v35.89,39.01 | v37.19,37.72 40.01,37.72 41.53,36.2 IC2.12
  Bottom 0.152: v35.28,56.84 35.28,43.28 v34.75,42.75 | v37.19,37.72 v35.89,39.01
N$28  (via drill 0.38)
  Top 0.152: v24.16,47.55 23.39,47.55 v21.72,45.87 | v16.99,45.87 15.62,44.5 R44.2
  Bottom 0.152: v24.16,47.55 24.46,47.24 24.46,46.63 T13.3 | v16.99,45.87 v21.72,45.87
N$29
  Top 0.152: T6.3 10.9,46.41 9.14,46.41 8.84,46.71 7.85,46.71 7.16,46.02 R15.2
N$30
  Top 0.152: T7.3 13.18,54.33 13.03,54.33 11.43,52.73 11.43,50.83 R16.2
N$31
  Top 0.152: T9.3 8.38,56.01 7.62,55.24 7.62,50.9 7.01,50.29 R17.2
N$32  (via drill 0.38)
  Top 0.152: v15.93,58.14 13.11,58.14 T10.3
  Bottom 0.152: v15.93,58.14 16.92,58.14 16.99,58.06 R18.2
N$33
  Top 0.152: T11.3 13.03,63.25 13.03,63.93 11.43,65.53 R19.2
N$34
  Top 0.152: 43.59,5.11 43.59,4.5 43.05,3.96 36.2,3.96 24.92,15.24 K2.16 | 43.59,5.11 43.59,13.41 41.3,15.7 41.3,15.85 R35.2 | 43.59,5.11 45.64,5.11 49.91,0.84 89.46,0.84 90.37,1.75 90.37,5.79 94.56,9.98 94.56,15.24 K1.16
N$35
  Top 0.152: T6.1 11.89,48.39 11.89,46.1 10.67,44.88 10.67,42.67 9.83,41.83 9.83,39.7 10.13,39.4 R22.1
N$36
  Top 0.152: R23.1 9.75,48.01 12.04,50.29 12.04,51.28 12.19,51.44 12.19,52.27 T7.1
N$37
  Top 0.152: T9.1 6.33,57.38 6.33,52.96 6.93,52.35 R24.1
N$38
  Top 0.152: T10.1 12.04,56.08 9.6,56.08 8.31,54.79 R25.1
N$39  (via drill 0.38)
  Top 0.152: C2.2 13.64,36.8 12.65,35.81 9.68,35.81 8.84,36.65 8.84,39.32 R22.2 8.91,39.4 8.91,41.38 10.06,42.52 v10.06,43.28 | v14.63,40.23 14.02,39.62 14.02,39.4 R26.2 | v7.01,53.72 7.01,54.71 R25.2 | v8.23,53.34 8.23,52.35 R24.2 8.31,52.27 8.91,51.66 8.91,49.76 8.76,49.61 8.61,49.61 7.01,48.01 R23.2 6.78,48.01 6.48,47.7 6.48,46.94 | 6.48,46.94 6.48,45.41 6.55,45.34 6.55,44.73 4.5,42.67 4.5,41.99 IC8.7 | 6.48,46.94 v6.55,46.94
  Bottom 0.152: v14.63,40.23 13.11,40.23 v10.06,43.28 10.06,43.43 v6.55,46.94 | v7.01,53.72 7.85,53.72 v8.23,53.34
N$40  (via drill 0.38)
  Top 0.152: v14.86,38.79 14.71,38.63 13.56,38.63 12.88,39.32 12.72,39.32 R26.1 | v2.06,37.87 3.12,36.8 IC8.1 3.12,36.73 3.12,35.28 1.6,33.76 1.6,18.29 1.75,18.14 3.5,18.14 | v9.45,36.88 11.73,36.88 C2.1 | 3.5,18.14 3.5,9.83 2.59,8.91 F2.P$2 | 3.5,18.14 3.5,20.8 5.03,22.33 5.03,27.28 D1.C 5.11,27.36 13.87,27.36 15.47,28.96 33.6,28.96 34.14,28.42 34.14,26.67 35.2,25.6 35.2,24.99 | 35.2,24.99 35.2,22.86 C8.1 | v58.9,16.31 64.39,10.82 67.59,10.82 C7.1 | 35.2,24.99 v40.01,24.99
  Bottom 0.152: v14.86,38.79 13.72,38.79 5.79,46.71 2.59,46.71 2.06,46.18 v2.06,37.87 3.05,36.88 v9.45,36.88 | v58.9,16.31 57.99,16.31 57.76,16.08 54.33,16.08 50.9,19.51 45.34,19.51 40.01,24.84 v40.01,24.99
N$41
  Bottom 0.152: T12.1 23.55,52.5 23.55,53.42 24.08,53.95 R37.1
N$42  (via drill 0.38)
  Top 0.152: R21.2 74.3,13.41 v71.17,10.29 | v30.4,11.81 23.77,18.44 v23.01,18.44 | v14.17,28.5 14.02,28.5 13.11,29.41 H2.1
  Bottom 0.152: v71.17,10.29 71.17,8.53 66.52,3.89 59.97,3.89 57.99,5.87 43.97,5.87 38.02,11.81 v30.4,11.81 | v23.01,18.44 23.01,19.66 v14.17,28.5
N$43
  Top 0.152: T15.1 11.89,43.05 11.89,43.97 11.43,44.42 R38.1
N$44  (via drill 0.38)
  Top 0.152: T14.1 20.04,45.03 v20.34,44.73
  Bottom 0.152: v20.34,44.73 21.18,44.73 21.49,44.42 22.71,44.42 22.94,44.65 R39.1
N$45
  Top 0.152: IC7.4 123.83,36.27 122.99,35.43 115.52,35.43 113.92,37.03 113.08,37.03 T5.1
N$46
  Bottom 0.152: T13.1 23.55,48.62 23.55,45.26 23.62,45.19 23.62,42.82 23.01,42.22 R40.1
N$47  (via drill 0.38)
  Top 0.152: v8.61,61.27 12.04,61.27 T11.1 | v1.45,46.1 1.45,45.72 3.89,43.28 3.89,40.39 6.93,37.34 6.93,36.8 IC8.4
  Bottom 0.152: v8.61,61.27 8.23,61.27 4.95,64.54 2.67,64.54 1.45,63.32 v1.45,46.1
N$48
  Top 0.152: T14.3 19.13,43.66 19.13,41.91 R43.2
N$49  (via drill 0.38)
  Top 0.152: v25.3,45.87 26.9,44.27 26.9,42.22 v25.91,41.22 | v24.54,41 24.54,40.39 24.16,40.01 R41.2
  Bottom 0.152: v25.3,45.87 25.3,47.24 24.54,48.01 24.54,50.37 T12.3 | v25.91,41.22 24.77,41.22 v24.54,41
N$50
  Top 0.152: T15.3 10.97,41 11.73,41 12.42,40.31 13.72,40.31 15.32,41.91 R42.2
RHVTRIG
  Top 0.152: R21.1 74.3,20.42 74.52,20.65 74.52,24.54 71.63,27.43 67.59,27.43 67.36,27.2 IC5.3
RTS+
  Bottom 0.152: X5.1 38.1,3.05 28.57,12.57 28.57,24.08 24.77,27.89 K2.O2
RTS-
  Top 0.152: X5.2 42.6,5.41 42.6,10.82 34.14,19.28 34.14,26.14 32.38,27.89 K2.O1
RVSEL
  Top 0.152: IC5.25 59.59,34.37 55.02,34.37 53.8,35.59 48.01,35.59 47.85,35.43 47.32,35.43 45.34,37.41 41.99,37.41 IC2.11
SCL  (via drill 0.38)
  Top 0.152: v79.17,30.25 79.17,32.77 76.66,35.28 70.03,35.28 68.5,33.76 67.36,33.76 IC5.13 | v84.89,25.53 84.89,19.96 76.58,11.66 76.58,9.45 76.66,9.37 X2.2 76.66,9.3 76.66,8 75.89,7.24 v75.51,7.24 | v50.98,5.11 48.16,7.92 48.16,9.3 X4.2
  Bottom 0.152: v79.17,30.25 80.16,30.25 v84.89,25.53 | v50.98,5.11 58.29,5.11 59.82,3.58 71.86,3.58 v75.51,7.24
SDA  (via drill 0.38)
  Top 0.152: v69.19,31.47 69.19,31.62 67.82,32.99 67.36,32.99 IC5.12 | v71.09,26.36 71.09,25.98 73.38,23.7 v73.38,21.11 | v77.19,11.43 77.19,9.6 77.42,9.37 X2.3 77.42,9.3 77.42,7.92 74.6,5.11 55.02,5.11 54.03,6.1 54.03,8.84 51.66,11.2 49.38,11.2 48.92,10.74 48.92,9.37 X4.3
  Bottom 0.152: v69.19,31.47 69.19,28.27 v71.09,26.36 | v73.38,21.11 73.38,15.24 v77.19,11.43
SPKR  (via drill 0.38)
  Top 0.152: v93.04,59.44 94.56,60.96 R14.1 | v93.04,41 90.07,38.02 89.61,38.02 87.63,36.04 v87.63,32.16 | v69.8,30.86 68.96,30.86 68.12,31.7 68.12,32 67.74,32.38 67.36,32.38 IC5.11
  Bottom 0.152: v93.04,41 v93.04,59.44 | v87.63,32.16 86.33,30.86 v69.8,30.86
TCK  (via drill 0.38)
  Top 0.152: 57.42,21.3 57.45,21.34 57.45,26.82 v58.37,27.74 58.45,27.81 59.59,27.81 IC5.35 | 57.42,21.3 56.54,20.42 56.54,19.74 R32.1 | 70.41,9.68 70.41,12.04 67.82,14.63 64.08,14.63 v59.05,19.66 | 70.41,9.68 70.41,6.1 70.26,5.94 68.81,5.94 67.82,6.93 67.67,6.93 C18.1 | v57.45,21.26 57.42,21.3 | v6.93,59.97 5.41,58.45 3.81,58.45 SV1.3 | v33.76,44.04 33.76,43.66 33.3,43.2 v33.3,41.99 | v98.83,16.23 v105.39,22.78 | v72.01,10.29 71.4,9.68 70.41,9.68
  Bottom 0.152: v57.45,21.26 v59.05,19.66 | v6.93,59.97 8.38,59.97 15.62,67.21 27.74,67.21 34.67,60.27 34.67,44.96 v33.76,44.04 | v33.3,41.99 34.52,40.77 34.52,39.55 36.96,37.11 47.4,37.11 48.23,36.27 48.23,29.34 47.24,28.35 47.24,27.89 47.62,27.51 58.14,27.51 v58.37,27.74 | v105.39,22.78 105.39,29.03 110.19,33.83 110.19,38.18 S5.2 | v98.83,16.23 85.57,16.23 79.63,10.29 v72.01,10.29
TDI  (via drill 0.38)
  Top 0.152: R34.1 6.02,60.96 4.5,59.44 2.59,59.44 2.06,58.9 2.06,55.09 SV1.5 | v58.45,26.52 59.59,26.52 IC5.37 | v98.75,20.57 102.64,20.57 104.32,22.25 104.32,22.55 108.2,26.44 111.71,26.44 113.16,27.89 113.31,27.89 C20.1 | v72.77,23.47 72.77,23.85 v70.26,26.36 | v20.27,52.05 20.5,52.05 28.35,44.2 28.35,41.53 34.67,35.2 v36.2,35.2 | v46.94,29.64 49.23,29.64 50.98,27.89 53.11,27.89 53.26,27.74 53.26,25.53 51.82,24.08 51.82,22.94 S7.2
  Bottom 0.152: S7.2 54.1,22.94 57.68,26.52 v58.45,26.52 58.98,27.05 58.98,27.66 62.33,31.01 64.92,31.01 65.38,30.56 66.22,30.56 70.26,26.52 v70.26,26.36 | v98.75,20.57 87.86,20.57 87.71,20.42 75.82,20.42 v72.77,23.47 | SV1.5 6.55,53.34 7.85,52.05 v20.27,52.05 | v36.2,35.2 38.25,35.2 42.9,30.56 46.02,30.56 v46.94,29.64
TDO  (via drill 0.38)
  Top 0.152: v91.9,21.64 89.53,21.64 R36.1 | v100.13,21.64 103.25,21.64 104.01,22.4 104.01,24.16 106.3,26.44 106.3,27.89 C21.1 | v61.87,25.83 59.66,25.83 IC5.38 | v23.24,34.06 v19.36,37.95
  Bottom 0.152: v100.13,21.64 v91.9,21.64 87.02,21.64 83.21,25.45 80.54,25.45 80.24,25.15 65.91,25.15 65.23,25.83 62.1,25.83 | 62.1,25.83 62.1,24.84 64.85,22.1 64.85,20.42 55.85,11.43 53.65,11.43 51.51,9.3 51.51,8.23 49.91,6.63 49.45,6.63 49.07,7.01 49.07,7.92 43.05,13.95 42.67,13.95 37.57,19.05 S8.3 36.8,19.05 36.8,25.76 33.6,28.96 33.07,28.96 27.96,34.06 v23.24,34.06 | 62.1,25.83 v61.87,25.83 | v19.36,37.95 16.46,40.84 13.64,40.84 9.45,45.03 9.45,45.11 3.81,50.75 SV1.6
TEST  (via drill 0.38)
  Top 0.152: v86.87,22.63 86.87,18.59 89.53,15.93 R20.1 | v66.06,25.83 67.28,25.83 IC5.1 | v32.92,34.67 v30.25,37.34
  Bottom 0.152: v86.87,22.63 86.49,22.63 83.29,25.83 71.86,25.83 71.48,25.45 66.45,25.45 v66.06,25.83 65.46,26.44 61.65,26.44 60.5,25.3 57.99,25.3 53.57,20.88 46.1,20.88 35.2,31.77 35.2,32.38 v32.92,34.67 | SV1.1 3.81,63.17 2.06,61.42 2.06,52.88 3.12,51.82 5.03,51.82 9.75,47.09 9.75,45.19 11.81,43.13 19.58,43.13 25.38,37.34 v30.25,37.34
TMS  (via drill 0.38)
  Top 0.152: v5.56,62.33 6.71,63.48 R33.1 | v58.06,24.54 57.84,24.77 57.84,26.75 58.22,27.13 59.59,27.13 IC5.36 | v32.69,31.39 28.57,31.39 21.18,38.79 20.73,38.79 S6.2 | v66.29,4.5 67.59,3.2 C19.1 | v57.38,16.99 v64.31,10.06 | v13.87,52.65 17.6,48.92 v17.6,42.52
  Bottom 0.152: v5.56,62.33 5.56,57.68 5.52,57.65 | 5.52,57.65 3.81,55.93 SV1.4 | v58.06,24.54 57.68,24.54 53.76,20.61 | 53.76,20.61 53.72,20.57 45.95,20.57 35.13,31.39 v32.69,31.39 | v66.29,4.5 66.29,8.08 v64.31,10.06 | 53.76,20.61 v57.38,16.99 | v13.87,52.65 8.91,57.61 5.56,57.61 5.52,57.65 | v17.6,42.52 17.6,41.91 20.65,38.86 S6.2
VBAT  (via drill 0.38)
  Top 0.152: v94.87,42.9 R45.1 95.78,41.91 92.96,39.09 v92.96,38.02 | v103.1,44.35 102.34,44.35 102.26,44.42 R46.2 | v61.34,32.54 61.27,32.46 59.66,32.46 IC5.28
  Bottom 0.152: v94.87,42.9 94.87,50.75 95.25,51.13 96.32,51.13 v103.1,44.35 | v61.34,32.54 64.85,32.54 65,32.38 70.71,32.38 72.62,34.29 83.21,34.29 84.96,36.04 87.17,36.04 88.85,34.37 89.31,34.37 v92.96,38.02
VCC  (via drill 0.38)
  Top 0.305: v113.92,65.84 96.7,65.84 95.63,64.77 C10.1 95.48,64.69 v92.35,61.57 | IC3.3 117.27,44.12 119.02,44.12 121.77,46.86 123.06,46.86 123.29,47.09 123.29,53.95 121.69,55.55 121.69,58.14 118.87,60.96 SG1.+ 118.72,61.04 117.35,62.41 111.78,62.41 111.56,62.18 107.97,62.18 L3.1 | v47.24,7.24 47.24,9.3 X4.1 | v74.22,10.97 75.82,9.37 X2.1
  Bottom 0.305: v113.92,65.84 118.8,60.96 SG1.+ | 102.18,18.29 102.18,20.57 96.47,26.29 96.47,31.17 K1.S2 94.56,33.15 94.56,37.41 92.35,39.62 v92.35,61.57 | 102.18,18.29 102.18,15.24 K1.1 | K2.S2 24.77,32.99 26.59,31.17 26.59,26.67 28.96,24.31 28.96,24 32.38,20.57 K2.1 35.43,12.19 43.51,12.19 47.24,8.46 v47.24,7.24 48.23,6.25 59.51,6.25 64.24,10.97 v74.22,10.97 74.45,10.74 77.5,10.74 80.09,13.34 80.09,15.32 83.06,18.29 102.18,18.29
XIN
  Top 0.152: IC5.6 67.36,29.18 72.77,29.18 73.61,30.02 Q3.2 73.69,30.1 73.91,30.33 73.91,31.7 C12.1
XOUT
  Top 0.152: IC5.5 67.36,28.5 73.53,28.5 73.61,28.42 Q3.1 73.69,28.35 74.98,27.05 76.2,27.05 C11.1